# EAGLE board control (EAGLE 9.6.2)
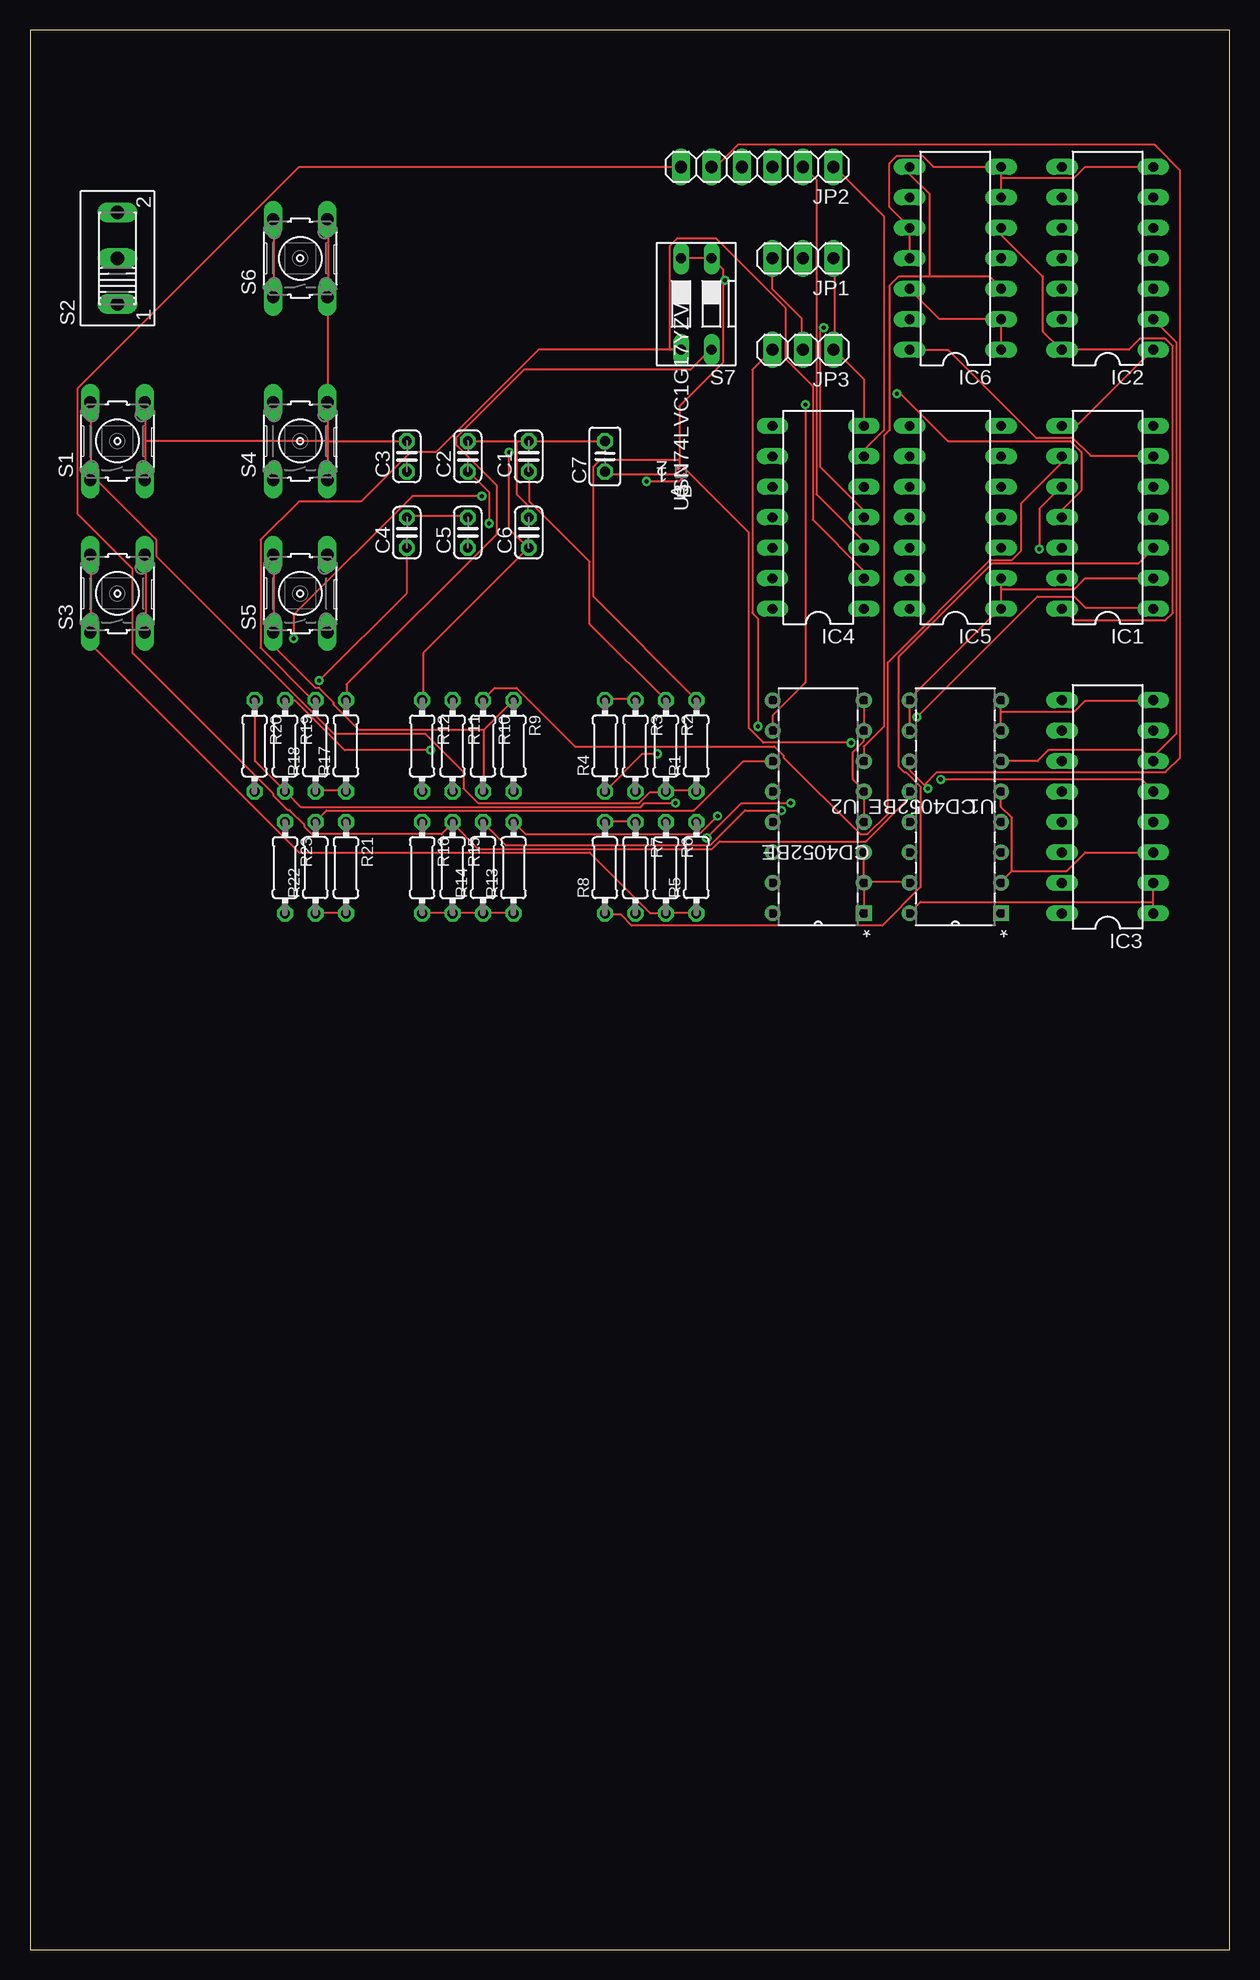
[diagram p0: board, top side]
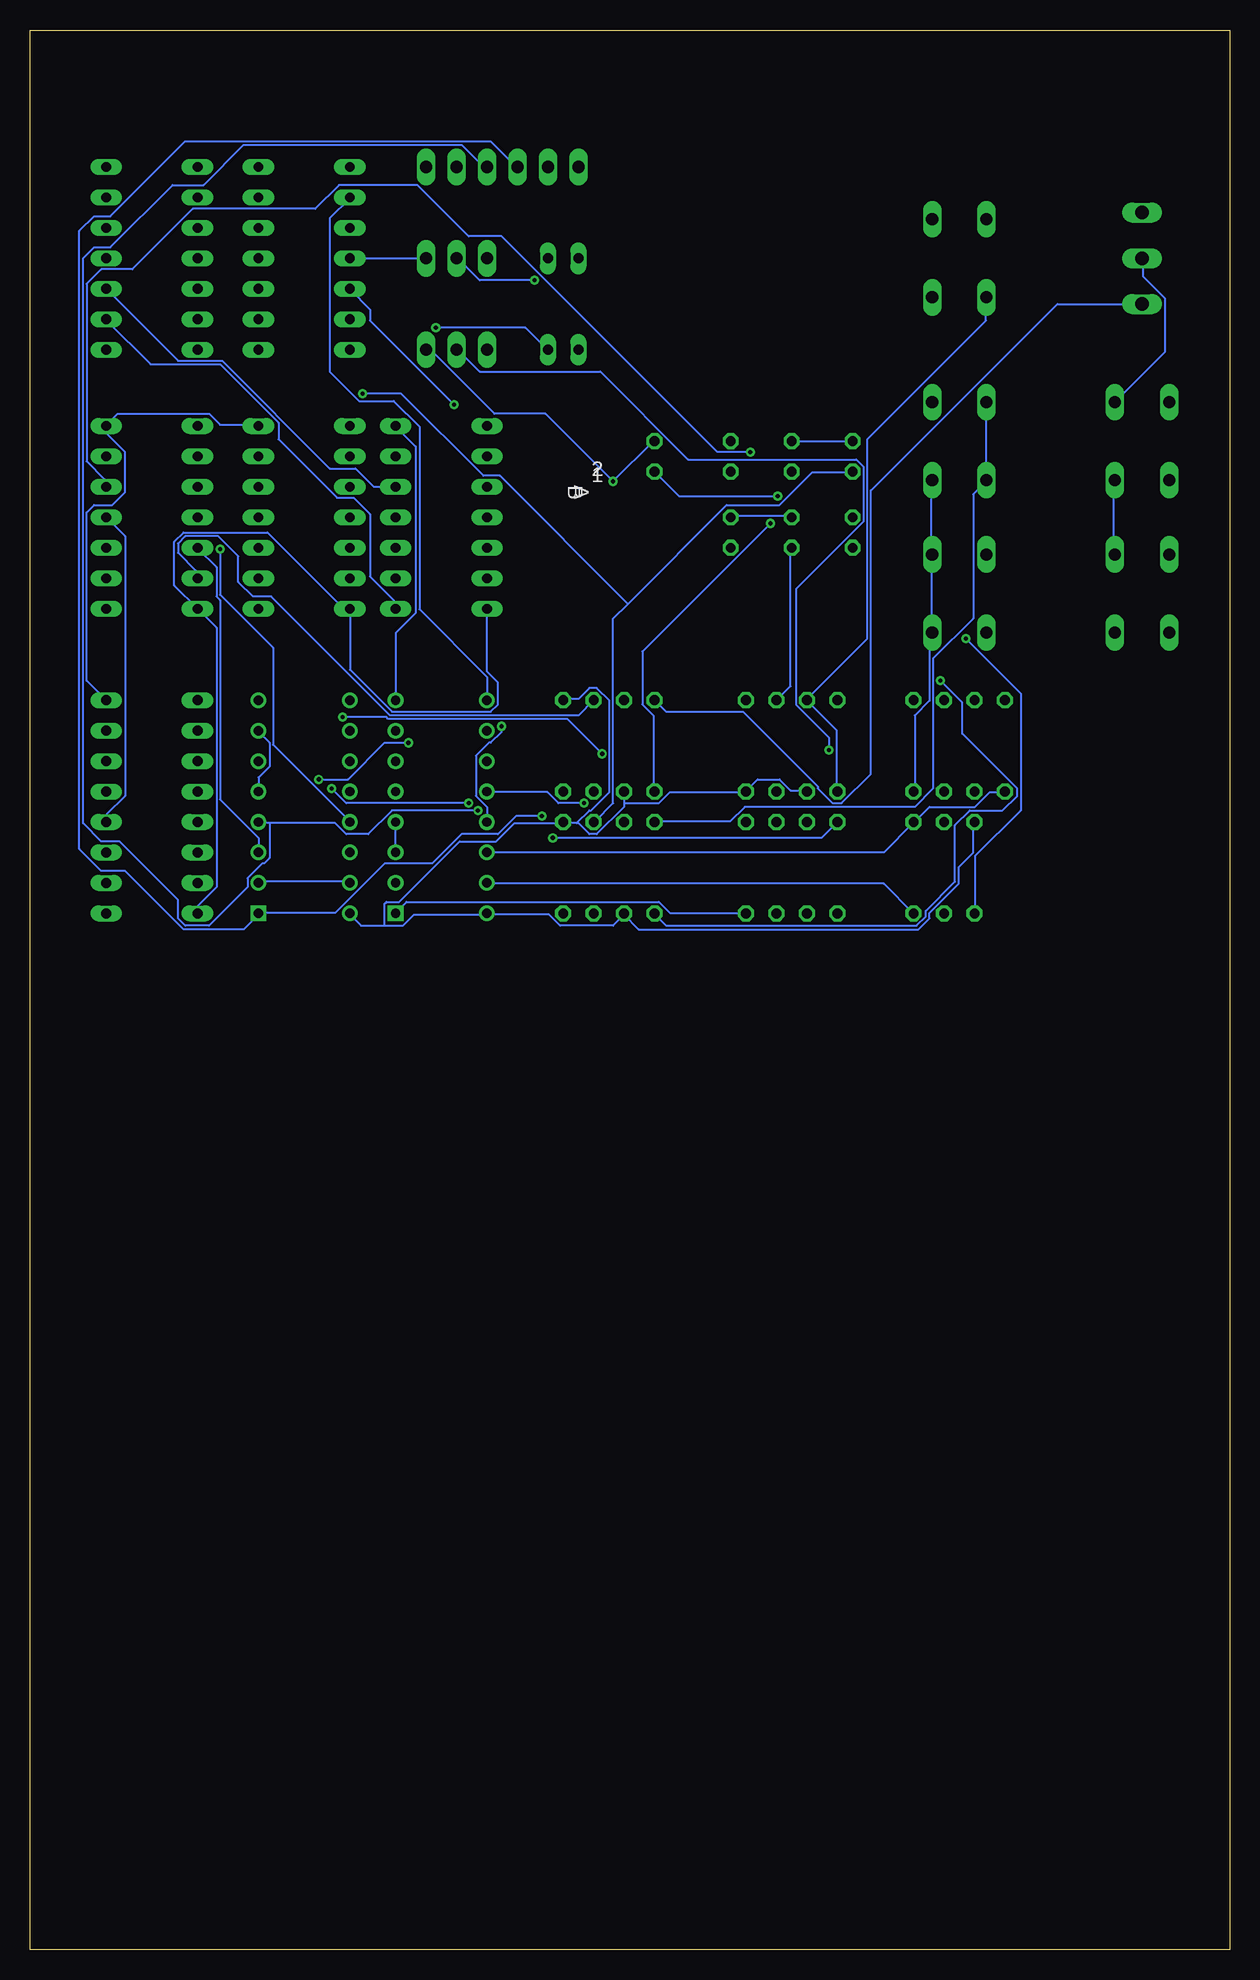
[diagram p1: board, bottom side, seen from below]

Size 100 x 160 mm. Coordinates in mm from the lower left corner, seen from the top.
Outline: 100,0 100,160 0,160 0,0 100,0
Copper layers (1*16): Top 0.035mm / dielectric 1.5mm / Bottom 0.035mm
Design rules "default": minimum track width 6mil, minimum drill 0.35mm, track to track 6mil, track to pad 6mil, pad to pad 6mil, via to via 6mil, smd to smd 6mil, copper to edge 40mil, drill to drill 6mil, minimum pad ring 10mil, minimum via ring 8mil, stop-mask expansion 4mil, vias tented up to drill 0mil, thermal gap 10mil

## Footprints (pad centres in the part's own frame; a part is rotated, then mirrored left to right if it is on the bottom)
C025-024X044 = drill 0.813 octagon: 1 -1.27,0; 2 1.27,0
C025-025X050 = drill 0.813 octagon: 1 -1.27,0; 2 1.27,0
DIL14 = drill 0.813 long: 1 -7.62,-3.81; 2 -5.08,-3.81; 3 -2.54,-3.81; 4 0,-3.81; 5 2.54,-3.81; 6 5.08,-3.81; 7 7.62,-3.81; 8 7.62,3.81; 9 5.08,3.81; 10 2.54,3.81; 11 0,3.81; 12 -2.54,3.81; 13 -5.08,3.81; 14 -7.62,3.81
DIL16 = drill 0.813 long: 1 -8.89,-3.81; 2 -6.35,-3.81; 3 -3.81,-3.81; 4 -1.27,-3.81; 5 1.27,-3.81; 6 3.81,-3.81; 7 6.35,-3.81; 8 8.89,-3.81; 9 8.89,3.81; 10 6.35,3.81; 11 3.81,3.81; 12 1.27,3.81; 13 -1.27,3.81; 14 -3.81,3.81; 15 -6.35,3.81; 16 -8.89,3.81
1X03 = drill 1.016 long: 1 -2.54,0; 2 0,0; 3 2.54,0
1X06 = drill 1.016 long: 1 -6.35,0; 2 -3.81,0; 3 -1.27,0; 4 1.27,0; 5 3.81,0; 6 6.35,0
0204/7 = drill 0.813 octagon: 1 -3.81,0; 2 3.81,0
B3F-10XX = drill 1.016 long: 1 -3.251,2.261; 2 3.251,2.261; 3 -3.251,-2.261; 4 3.251,-2.261
255SB = drill 1.118 long: 1 -3.81,0; 2 0,0; 3 3.81,0
DS-02 = drill 0.813 long: 1 -1.27,-3.81; 2 1.27,-3.81; 3 1.27,3.81; 4 -1.27,3.81
N16 = drill 0.787 pad 1.295 square: 1 -7.62,17.78 | drill 0.787 pad 1.295: 2 -7.62,15.24; 3 -7.62,12.7; 4 -7.62,10.16; 5 -7.62,7.62; 6 -7.62,5.08; 7 -7.62,2.54; 8 -7.62,0; 9 0,0; 10 0,2.54; 11 0,5.08; 12 0,7.62; 13 0,10.16; 14 0,12.7; 15 0,15.24; 16 0,17.78
YZV4 = smd 0.305 x 0.305: A1 -0.25,0.25; A2 0.25,0.25; B1 -0.25,-0.25; B2 0.25,-0.25

## Placement (x,y rotation side)
C1  [C025-024X044]  41.58,124.46 90 top
C2  [C025-024X044]  36.5,124.46 90 top
C3  [C025-024X044]  31.42,124.46 90 top
C4  [C025-024X044]  31.42,118.11 90 top
C5  [C025-024X044]  36.5,118.11 90 top
C6  [C025-024X044]  41.58,118.11 90 top
C7  [C025-025X050]  47.93,124.46 90 top
IC1  74LS14N  [DIL14]  89.84,119.38 90 top
IC2  74LS08N  [DIL14]  89.84,140.97 90 top
IC3  74LS109N  [DIL16]  89.84,95.25 90 top
IC4  74LS32N  [DIL14]  65.71,119.38 90 top
IC5  74LS00N  [DIL14]  77.14,119.38 90 top
IC6  74LS90N  [DIL14]  77.14,140.97 90 top
JP1  [1X03]  64.44,140.97 180 top
JP2  [1X06]  60.63,148.59 180 top
JP3  [1X03]  64.44,133.35 180 top
R1  [0204/7]  55.55,100.33 90 top
R2  [0204/7]  53.01,100.33 270 top
R3  [0204/7]  50.47,100.33 270 top
R4  [0204/7]  47.93,100.33 90 top
R5  [0204/7]  55.55,90.17 90 top
R6  [0204/7]  53.01,90.17 270 top
R7  [0204/7]  50.47,90.17 270 top
R8  [0204/7]  47.93,90.17 90 top
R9  [0204/7]  40.31,100.33 270 top
R10  [0204/7]  37.77,100.33 270 top
R11  [0204/7]  35.23,100.33 270 top
R12  [0204/7]  32.69,100.33 270 top
R13  [0204/7]  40.31,90.17 90 top
R14  [0204/7]  37.77,90.17 90 top
R15  [0204/7]  35.23,90.17 270 top
R16  [0204/7]  32.69,90.17 270 top
R17  [0204/7]  26.34,100.33 90 top
R18  [0204/7]  23.8,100.33 90 top
R19  [0204/7]  21.26,100.33 270 top
R20  [0204/7]  18.72,100.33 270 top
R21  [0204/7]  26.34,90.17 270 top
R22  [0204/7]  23.8,90.17 90 top
R23  [0204/7]  21.26,90.17 270 top
S1  [B3F-10XX]  7.29,125.73 90 top
S2  [255SB]  7.29,140.97 90 top
S3  [B3F-10XX]  7.29,113.03 90 top
S4  [B3F-10XX]  22.53,125.73 90 top
S5  [B3F-10XX]  22.53,113.03 90 top
S6  [B3F-10XX]  22.53,140.97 90 top
S7  DS02  [DS-02]  55.55,137.16 180 top
U1  CD4052BE  [N16]  73.33,104.14 180 top
U2  CD4052BE  [N16]  61.9,104.14 180 top
U3  SN74LVC1G17YZVR  [YZV4]  54.28,123.19 90 top

## Library data of the parts
C1-C7 = rcl; SPICEPREFIX: C
IC1-IC6 = 74xx-us
JP1-JP3 = pinhead
R1-R23 = rcl; SPICEPREFIX: R
S1 S3-S6 = switch-omron; MPN: B3F-1000; OC_FARNELL: 176432; OC_NEWARK: 36M3542
S2 = switch
S7 = Switch; CATEGORY: SWITCH; MPN: MCNDS02; TYPE: SPST
U1 U2 = cd family; DATASHEET_URL: http://www.ti.com/lit/gpn/CD4052B; DESCRIPTION: CMOS Differential 4-Channel Analog Multiplexer/Demultiplexer with Logic-Level Conversion; FAMILY_NAME: ANALOG SWITCH/MULTIPLEXER (greater than 5V); GENERIC_PART_NUMBER: CD4052B; INDUSTRY_STD_PKG_TYPE: PDIP; MANUFACTURER: Texas Instruments; PACKAGE_DESIGNATOR: N; PIN_COUNT: 16
U3 = SN74LVC1G17YZVR; DATASHEET_URL: http://www.ti.com/lit/gpn/SN74LVC1G17; DESCRIPTION: Single Schmitt-Trigger Buffer; FAMILY_NAME: LL SCHMITT TRIGGER BUFFER; GENERIC_PART_NUMBER: SN74LVC1G17; INDUSTRY_STD_PKG_TYPE: DSBGA; MANUFACTURER: Texas Instruments; MANUFACTURER_PART_NUMBER: SN74LVC1G17YZVR; PACKAGE_DESIGNATOR: YZV; PIN_COUNT: 4; VENDOR: Texas Instruments

## Nets
+5V: IC3.1 IC3.2 JP1.2 R1.2 R3.2 R5.2 R7.2 R9.2 R11.2 R23.1 S7.1 S7.2 U1.16 U2.16 U3.A2
+5V~: JP1.3 JP3.2 R19.1
BRIGHT: IC1.6 IC6.14
DATA_HALT: IC2.2 IC3.6 IC4.1 U1.6
DATA_RST: IC1.8 IC2.1
DP_HLT: IC4.3 JP2.2
DP_HR+: JP2.5 R16.1 U1.11
DP_HR++: JP2.6 R15.1 U1.12
DP_MIN+: JP2.3 R14.2 U1.4
DP_MIN++: JP2.4 R13.2 U1.1
DP_RST: IC4.6 JP2.1
DS_INTSTY: JP3.3 U2.13
GND: C1.2 C2.2 C3.2 C4.2 C5.2 C6.2 C7.2 IC1.7 IC2.7 IC3.3 IC3.8 IC4.7 IC5.7 IC6.6 IC6.7 IC6.10 IC6.11 JP1.1 JP3.1 R13.1 R14.1 R15.2 R16.2 R17.1 R18.1 S1.3 S1.4 S2.2 S3.3 S3.4 S4.3 S4.4 S5.3 S5.4 S6.3 S6.4 U1.2 U1.5 U1.7 U1.8 U1.15 U2.1 U2.2 U2.3 U2.4 U2.5 U2.7 U2.8 U3.B1
HLT_TG: IC1.4 IC3.4
HR_PB: IC1.10 U1.13
INC_LG: IC5.3
INC_SM: IC1.2 IC5.1 IC5.2 U1.9 U1.10
INIT_NEG: IC3.5 U3.B2
INTSTY0: R19.2 R20.1 U2.12
INTSTY1: R20.2 R21.1 U2.14
INTSTY2: R21.2 R22.1 U2.15
INTSTY3: R22.2 U2.11
MIN_PB: IC1.12 U1.3
N$1: R1.1 R2.2 S1.1 S1.2
N$2: C1.1 IC1.13 R2.1
N$3: R5.1 R6.2 S3.1 S3.2
N$4: C3.1 IC1.11 R6.1
N$5: R3.1 R4.2 S2.1
N$6: C2.1 IC1.1 R4.1
N$7: R11.1 R12.2 S6.1 S6.2
N$8: C6.1 IC1.5 R12.1
N$9: R9.1 R10.2 S5.1 S5.2
N$10: IC2.3 IC4.5
N$11: C5.1 IC1.9 R10.1
N$12: R7.1 R8.2 S4.1 S4.2
N$13: C4.1 IC1.3 R8.1
N$14: IC6.3 IC6.8 U2.6
N$15: C7.1 R23.2 U3.A1
N$16: U1.14
N$17: IC6.9 U2.9
N$18: IC6.1 IC6.2 IC6.12 U2.10
SYS_HALT: IC4.2 R18.2 S7.3
SYS_RST: IC4.4 R17.2 S7.4
VCC: IC1.14 IC2.14 IC3.16 IC4.14 IC5.14 IC6.5

## Tracks (layer width: path | path; a pad name or v marks a point on that pad's centre or on a via)
+5V  (via drill 0.35)
  Top 0.152: 54.13,124.21 54.13,128.63 57.79,132.28 57.79,139.14 | 54.13,124.21 54.13,123.44 U3.A2 | 57.79,139.14 57.79,140.06 56.87,140.97 S7.1 S7.2 | 57.79,139.14 v57.94,139.14 | 54.13,124.21 47.57,124.21 46.97,123.6 46.97,112.78 55.5,104.24 R1.2 | 93.6,87.33 93.6,88.85 IC3.2 | 93.6,87.33 93.6,86.41 IC3.1 | 93.6,87.33 74.24,87.33 73.33,86.41 U1.16
  Bottom 0.152: v57.94,139.14 62.51,139.14 64.34,140.97 JP1.2 | R11.2 35.23,96.62 36.6,96.62 37.52,97.54 39.35,97.54 40.26,96.62 R9.2 40.41,96.47 46.66,96.47 47.57,95.56 50.47,95.56 | 54.43,93.88 54.28,93.88 53.37,92.96 52.76,92.96 50.47,95.25 50.47,95.56 | 54.43,93.88 55.5,93.88 R5.2 55.65,93.88 59.61,93.88 61.14,92.35 64.19,92.35 69.21,87.33 70.28,87.33 70.43,87.17 70.43,85.34 | R3.2 50.47,95.56 | 54.43,93.88 53.37,94.94 53.21,94.94 51.69,96.47 51.69,104.09 52.76,105.16 53.37,105.16 54.28,104.24 55.5,104.24 R1.2 | 61.9,86.26 68,86.26 68.91,85.34 70.43,85.34 | 70.43,85.34 72.42,85.34 73.33,86.26 U1.16 | 50.47,86.26 49.25,85.04 25.93,85.04 25.02,85.95 25.02,86.41 22.58,88.85 22.58,90.22 21.36,91.44 21.36,93.88 R23.1 | 61.9,86.26 56.72,86.26 55.8,85.34 51.38,85.34 50.47,86.26 | 61.9,86.26 U2.16 | 50.47,86.26 R7.2
+5V~  (via drill 0.35)
  Top 0.152: v33.4,99.97 26.24,99.97 22.12,104.09 21.36,104.09 R19.1 | JP1.3 61.9,138.38 64.34,135.94 64.34,133.35 JP3.2
  Bottom 0.152: v33.4,99.97 33.4,101.04 36.14,103.78 36.14,113.39 30.51,119.02 30.51,123.6 31.11,124.21 45.14,124.21 52.45,131.52 62.51,131.52 64.34,133.35 JP3.2
BRIGHT
  Top 0.152: IC6.14 76.53,133.35 83.85,126.03 86.89,126.03 88.42,124.51 93.6,124.51 IC1.6
DATA_HALT
  Top 0.152: U1.6 84,99.06 84.91,99.97 92.69,99.97 93.45,99.21 | 93.45,99.21 93.6,99.06 IC3.6 93.45,99.21 | 93.45,99.21 95.58,101.35 95.58,133.96 IC2.2
  Bottom 0.152: IC4.1 69.52,112.32 71.65,114.45 71.65,119.63 73.02,121.01 74.4,121.01 79.27,125.88 79.27,127.25 84.15,132.13 89.94,132.13 93.6,135.79 IC2.2
DATA_RST
  Top 0.152: IC1.8 86.13,127.1 87.35,127.1 93.6,133.35 IC2.1
DP_HLT
  Top 0.152: IC4.3 69.52,117.35 65.56,121.31 65.56,147.52 64.49,148.59 JP2.2
DP_HR+  (via drill 0.35)
  Top 0.152: U1.11 73.33,98.3 74.55,97.08 | v74.85,96.77 74.55,97.08 | v63.42,95.56 59.31,95.56 v56.41,92.66 | JP2.5 57.18,148.59 59,150.42 93.75,150.42 95.88,148.28 95.88,99.37 94.67,98.15 75.62,98.15 74.55,97.08
  Bottom 0.152: v74.85,96.77 73.63,95.56 v63.42,95.56 | v56.41,92.66 34.01,92.66 R16.1
DP_HR++
  Top 0.152: U1.12 73.33,96.01 69.67,92.35 57.48,92.35 56.87,91.75 37.36,91.75 35.23,93.88 | JP2.6 22.43,148.59 3.99,130.15 3.99,119.63 8.56,115.06 8.56,108.05 20.29,96.32 20.29,96.16 21.51,94.94 21.67,94.94 22.89,93.73 22.89,93.57 23.49,92.96 34.32,92.96 35.23,93.88 | 35.23,93.88 R15.1
DP_MIN+  (via drill 0.35)
  Top 0.152: v62.66,94.94 59.61,94.94 56.72,92.05 39.65,92.05 37.82,93.88 R14.2
  Bottom 0.152: 80.04,93.88 74.55,93.88 73.63,92.96 71.81,92.96 69.82,94.94 v62.66,94.94 | 80.04,93.88 80.95,93.88 U1.4 | JP2.3 62.21,148.59 64.03,150.42 82.17,150.42 85.52,147.07 88.11,147.07 93.29,141.88 94.67,141.88 95.58,140.97 95.58,93.88 94.06,92.35 92.53,92.35 87.66,87.48 87.66,85.95 87.05,85.34 85.06,85.34 81.86,88.54 81.86,89.31 80.64,90.53 80.49,90.53 80.04,90.98 80.04,93.88
DP_MIN++  (via drill 0.35)
  Top 0.152: v57.33,94.49 55.8,92.96 41.33,92.96 R13.2
  Bottom 0.152: v57.33,94.49 59.46,94.49 60.99,92.96 64.03,92.96 66.47,90.53 70.43,90.53 74.55,86.41 80.95,86.41 U1.1 80.95,86.26 82.17,85.04 87.2,85.04 92.07,89.92 94.06,89.92 95.88,91.75 95.88,143.26 94.67,144.47 93.29,144.47 87.05,150.72 61.6,150.72 59.46,148.59 JP2.4
DP_RST
  Top 0.152: IC4.6 69.52,124.97 71.2,126.64 71.2,144.47 67.08,148.59 JP2.1
DS_INTSTY  (via drill 0.35)
  Top 0.152: v60.68,101.96 60.68,110.95 60.22,111.4 60.22,131.67 JP3.3
  Bottom 0.152: U2.13 61.9,95.25 62.81,96.16 62.81,99.52 61.75,100.58 61.6,100.58 60.68,101.5 v60.68,101.96
GND  (via drill 0.35)
  Top 0.152: U1.7 80.95,103.18 | 80.95,103.18 U1.8 | 80.95,103.18 87.05,103.18 87.96,104.09 93.6,104.09 IC3.8 | 35.23,86.41 32.79,86.41 R16.2 | R13.1 40.26,86.41 37.82,86.41 R14.1 37.67,86.41 35.23,86.41 | 35.23,86.41 R15.2 | U2.8 U2.7 69.52,100.74 68.61,99.82 68.61,97.54 69.52,96.62 U2.5 U2.4 | U2.1 U2.2 69.52,89 | 69.52,89 73.33,89 U1.15 | 69.52,89 U2.3 | IC3.3 87.96,91.44 86.44,89.92 81.86,89.92 | 81.86,89.92 80.95,89 U1.2 | U1.5 80.95,95.25 81.86,94.34 81.86,89.92 | 80.95,147.68 IC6.7 75.31,148.59 74.4,149.5 72.26,149.5 71.65,148.89 71.65,145.24 73.33,143.56 IC6.10 IC6.11 | 80.95,147.68 IC6.6 | IC2.7 87.96,148.59 87.05,147.68 80.95,147.68 | IC4.7 69.52,130.91 67.08,133.35 | 67.08,133.35 67.08,140.97 JP1.1 | 67.08,133.35 JP3.1 | S3.3 9.63,109.88 9.63,116.28 S3.4 | 9.63,125.73 9.63,122.53 S1.3 | 9.63,125.73 9.63,128.93 S1.4 | C4.2 31.42,119.48 36.45,119.48 C5.2 | v51.38,122.38 54.13,122.38 54.43,122.68 54.43,122.83 U3.B1 | C2.2 40.56,125.73 | 40.56,125.73 C1.2 C7.2 | 40.56,125.73 40.56,121.31 41.48,120.4 41.48,119.48 C6.2 | S6.4 24.87,144.17 24.87,137.77 S6.3 24.87,137.62 24.87,129.08 S4.4 24.87,128.93 24.87,125.73 | R18.1 23.8,96.62 26.24,96.62 R17.1 | 24.87,125.73 24.87,122.53 S4.3 | 24.87,125.73 C3.2 | 24.87,125.73 9.63,125.73
  Bottom 0.152: IC5.7 80.95,127.1 84.15,127.1 85.06,128.02 92.69,128.02 93.6,127.1 IC1.7 93.6,126.95 93.6,126.34 92.07,124.82 92.07,121.46 93.14,120.4 94.67,120.4 95.28,119.79 95.28,105.77 IC3.8 | U1.5 80.95,97.69 80.04,98.6 80.04,100.58 80.95,101.5 U1.7 | U1.2 80.95,89 73.33,89 U1.15 | U2.3 U2.4 | R13.1 40.41,86.41 46.66,86.41 47.57,87.33 68.61,87.33 69.52,86.41 U2.1 | IC6.11 JP1.1 | S1.3 9.63,122.38 9.63,116.28 S3.4 | S2.2 7.19,140.97 7.19,139.45 5.36,137.62 5.36,133.2 9.47,129.08 S1.4 | C6.2 41.48,119.48 36.6,119.48 C5.2 | C7.2 48.03,125.73 v51.38,122.38 57.02,128.02 61.29,128.02 66.62,133.35 JP3.1 | C2.2 C3.2 | 24.87,116.28 24.87,109.88 S5.3 24.87,109.73 25.02,109.58 25.02,104.09 26.24,102.87 26.24,96.62 R17.1 | 24.87,116.28 24.87,122.38 S4.3 | 24.87,116.28 S5.4 | U2.8 69.52,109.73 67.84,111.4 67.84,125.27 69.52,126.95 IC4.7
HLT_TG
  Bottom 0.152: IC1.4 92.07,117.81 92.07,96.16 93.6,94.64 93.6,94.03 IC3.4
HR_PB  (via drill 0.35)
  Top 0.152: v84.15,116.74 84.15,120.09 85.98,121.92 IC1.10
  Bottom 0.152: v84.15,116.74 84.15,112.93 79.73,108.51 79.73,100.43 73.33,94.03 U1.13
INC_SM
  Top 0.152: U1.10 U1.9 73.33,104.24 80.95,111.86 | IC5.2 80.95,113.39 | 80.95,113.39 80.95,111.86 | IC1.2 87.96,114.3 87.05,113.39 80.95,113.39 | 80.95,111.86 IC5.1
INIT_NEG  (via drill 0.35)
  Top 0.152: v68.45,100.58 61.14,100.58 59.92,101.8 59.92,118.11 54.59,123.44 U3.B2 | v75.92,97.54 92.69,97.54 93.6,96.62 IC3.5
  Bottom 0.152: v68.45,100.58 70.43,100.58 73.48,97.54 v75.92,97.54
INTSTY0  (via drill 0.35)
  Top 0.152: v53.82,95.56 51.23,95.56 50.93,95.25 22.58,95.25 21.36,96.47 R19.2 21.21,96.62 18.77,99.06 18.77,104.09 R20.1
  Bottom 0.152: v53.82,95.56 55.96,95.56 56.87,96.47 61.9,96.47 U2.12
INTSTY1
  Bottom 0.152: U2.14 28.83,91.44 26.39,93.88 R21.1 26.24,94.03 25.02,95.25 21.21,95.25 19.99,96.47 18.77,96.47 R20.2
INTSTY2
  Top 0.152: R22.1 23.8,86.41 26.24,86.41 R21.2
  Bottom 0.152: R21.2 28.83,88.85 61.9,88.85 U2.15
INTSTY3
  Top 0.152: U2.11 59.46,99.06 55.35,94.94 24.71,94.94 23.8,94.03 R22.2
MIN_PB
  Bottom 0.152: U1.3 80.95,92.66 84.15,95.86 84.15,112.47 84.45,112.78 84.45,115.21 85.98,116.74 IC1.12
N$1
  Top 0.152: R1.1 55.5,96.62 53.06,96.62 R2.2 52.91,96.47 51.69,96.47 50.78,95.56 37.36,95.56 36.14,96.77 36.14,98.15 32.94,101.35 25.32,101.35 10.54,116.13 10.54,117.5 5.66,122.38 5.05,122.38 S1.1 5.05,122.53 5.05,128.93 S1.2
N$2
  Top 0.152: R2.1 46.66,110.49 46.66,115.67 41.63,120.7 41.63,123.14 C1.1
  Bottom 0.152: R2.1 54.28,102.87 69.98,102.87 79.88,112.78 81.41,112.78 82.63,114 82.63,116.13 84.3,117.81 87.05,117.81 87.66,117.2 87.66,116.43 86.13,114.91 86.13,114.3 IC1.13
N$3
  Top 0.152: R5.1 55.5,86.41 53.06,86.41 R6.2 52.91,86.41 51.69,86.41 46.66,91.44 22.43,91.44 5.05,108.81 5.05,109.73 S3.1 5.05,109.88 5.05,116.28 S3.2
N$4  (via drill 0.35)
  Top 0.152: v72.26,129.69 72.57,129.69 76.53,125.73 86.74,125.73 87.66,124.82 87.66,121.61 86.13,120.09 86.13,119.48 IC1.11
  Bottom 0.152: 50.16,112.17 51.38,110.95 51.38,95.56 52.91,94.03 R6.1 | 50.16,112.17 41.94,120.4 37.52,120.4 34.77,123.14 31.42,123.14 C3.1 | v72.26,129.69 69.06,129.69 62.21,122.83 60.83,122.83 50.16,112.17
N$5
  Top 0.152: R4.2 48.03,104.24 50.47,104.24 R3.1
  Bottom 0.152: S2.1 14.35,137.16 29.9,121.61 29.9,97.99 32.33,95.56 33.1,95.56 34.32,96.77 34.32,96.93 40.56,103.18 46.97,103.18 R4.2
N$6  (via drill 0.35)
  Top 0.152: v38.28,118.87 38.28,121.46 36.6,123.14 C2.1 | v73.94,102.72 84,112.78 87.05,112.78 87.96,111.86 93.6,111.86 IC1.1 | v52.3,99.67 51.08,99.67 R4.1
  Bottom 0.152: v38.28,118.87 48.95,108.2 48.95,103.78 48.03,102.87 48.03,96.62 R4.1 | v73.94,102.72 70.28,102.72 70.13,102.56 55.19,102.56 v52.3,99.67
N$7
  Top 0.152: S6.1 20.29,137.77 20.29,144.17 S6.2
  Bottom 0.152: R12.2 32.79,96.62 32.79,101.65 35.23,104.09 R11.1 35.23,104.24 30.2,109.27 30.2,125.88 20.29,135.79 20.29,137.62 S6.1
N$8  (via drill 0.35)
  Top 0.152: R12.1 32.79,104.24 32.79,108.05 C6.1 41.48,116.89 39.95,118.42 v39.95,124.82
  Bottom 0.152: v39.95,124.82 42.7,124.82 60.68,142.8 63.42,142.8 67.69,147.07 74.24,147.07 76.23,145.09 86.44,145.09 91.47,140.06 94.06,140.06 95.28,138.84 95.28,124.05 93.75,122.53 93.75,121.92 IC1.5
N$9
  Top 0.152: S5.2 20.29,116.28 20.29,109.88 S5.1 20.29,109.73 20.29,108.66 23.8,105.16 24.11,105.16 25.32,103.94 25.32,103.78 27.46,101.65 37.82,101.65 | 37.82,101.65 37.82,96.62 R10.2 | R9.1 37.82,101.65
N$10
  Bottom 0.152: IC4.5 71.35,121.92 72.87,123.44 75.01,123.44 84,132.44 87.66,132.44 IC2.3
N$11
  Top 0.152: IC1.9 85.98,124.36 85.98,123.9 82.63,120.55 82.63,116.59 81.86,115.82 80.04,115.82 71.5,107.29 71.5,94.64 69.82,92.96 69.21,92.96 62.81,99.37 62.81,99.52 62.05,100.28 45.44,100.28 40.56,105.16 38.73,105.16 37.82,104.24 R10.1
  Bottom 0.152: R10.1 36.6,105.31 36.6,116.74 C5.1
N$12
  Top 0.152: R8.2 48.03,94.03 50.47,94.03 R7.1
  Bottom 0.152: S4.2 20.29,128.93 20.29,122.53 S4.1 20.29,122.38 21.36,121.31 21.36,110.95 24.71,107.59 24.71,96.77 26.24,95.25 40.41,95.25 41.63,94.03 47.88,94.03 R8.2
N$13  (via drill 0.35)
  Top 0.152: R8.1 48.03,86.26 49.25,86.26 50.16,85.34 71.04,85.34 74.24,88.54 74.24,96.93 73.02,98.15 72.87,98.15 72.42,98.6 72.42,107.75 80.19,115.52 92.38,115.52 93.6,116.74 IC1.3 | C4.1 31.42,113.08 v24.11,105.77
  Bottom 0.152: v24.11,105.77 22.28,103.94 22.28,101.35 17.7,96.77 17.7,96.16 18.92,94.94 21.67,94.94 22.89,93.73 22.89,89 25.32,86.56 25.32,86.11 26.09,85.34 46.97,85.34 47.88,86.26 R8.1
N$14
  Top 0.152: U2.6 69.52,100.28 71.2,101.96 71.2,126.19 71.65,126.64 71.65,138.68 72.42,139.45 75.01,139.45 | 75.01,139.45 80.04,139.45 80.95,138.53 IC6.3 | IC6.8 73.33,147.98 75.01,146.3 75.01,139.45
N$15  (via drill 0.35)
  Top 0.152: U3.A1 53.98,122.99 48.18,122.99 48.03,123.14 C7.1 | v21.97,109.27 21.97,111.25 31.88,121.16 v37.67,121.16
  Bottom 0.152: v21.97,109.27 17.4,104.7 17.4,94.94 21.21,91.13 21.21,86.41 R23.2 | v37.67,121.16 45.9,121.16 C7.1
N$17
  Bottom 0.152: U2.9 61.9,106.07 67.54,111.71 67.54,126.95 69.67,129.08 72.57,129.08 75.01,131.52 75.01,144.32 73.33,146 IC6.9
N$18  (via drill 0.35)
  Top 0.152: IC6.1 IC6.2 80.95,135.94 75.77,135.94 73.33,138.38 IC6.12 | U2.10 61.9,102.87 64.64,105.61 v64.64,128.78
  Bottom 0.152: v64.64,128.78 71.65,135.79 71.65,136.7 73.33,138.38 IC6.12
SYS_HALT
  Top 0.152: S7.3 53.37,133.35 | 53.37,133.35 42.39,133.35 33.86,124.82 31.72,124.82 27.61,120.7 22.43,120.7 19.23,117.5 19.23,108.51 23.49,104.24 23.8,104.24 R18.2 | IC4.2 69.52,114.91 65.25,119.18 65.25,130.3 62.97,132.59 62.97,136.86 57.18,142.65 53.98,142.65 53.37,142.04 53.37,133.35
SYS_RST  (via drill 0.35)
  Top 0.152: R17.2 26.39,104.24 26.39,105.46 38.89,117.96 38.89,122.07 35.54,125.42 35.54,126.03 41.17,131.67 55.04,131.67 56.72,133.35 S7.4 | IC4.4 69.52,119.94 65.86,123.6 65.86,134.87 v66.17,135.18
  Bottom 0.152: v66.17,135.18 58.7,135.18 56.87,133.35 S7.4
VCC
  Top 0.152: IC6.5 80.95,142.95 84.45,139.45 84.45,134.87 85.98,133.35 IC2.14 91.62,133.35 92.53,134.26 94.67,134.26 95.28,133.66 95.28,111.4 94.67,110.8 87.05,110.8 86.13,111.71 IC1.14
  Bottom 0.152: IC4.14 61.9,106.53 60.99,105.61 60.99,103.78 61.6,103.18 69.82,103.18 73.33,106.68 IC5.14 73.33,111.86 73.94,111.86 80.19,118.11 87.2,118.11 87.96,117.35 87.96,113.69 IC1.14 84.45,110.19 84.45,88.54 85.98,87.02 85.98,86.41 IC3.16